# Altium PCB AutoMOO_PCB.PcbDoc
Units mil, origin at the board's own origin, x right, y up, seen from the top; angles counter-clockwise.
Board outline 2700 x 2100 mil, 2 copper layers (Top Layer, Bottom Layer); 20 components, 26 nets, 112 pads, 5 vias.
Unrouted connection lines stored in the file: 4.
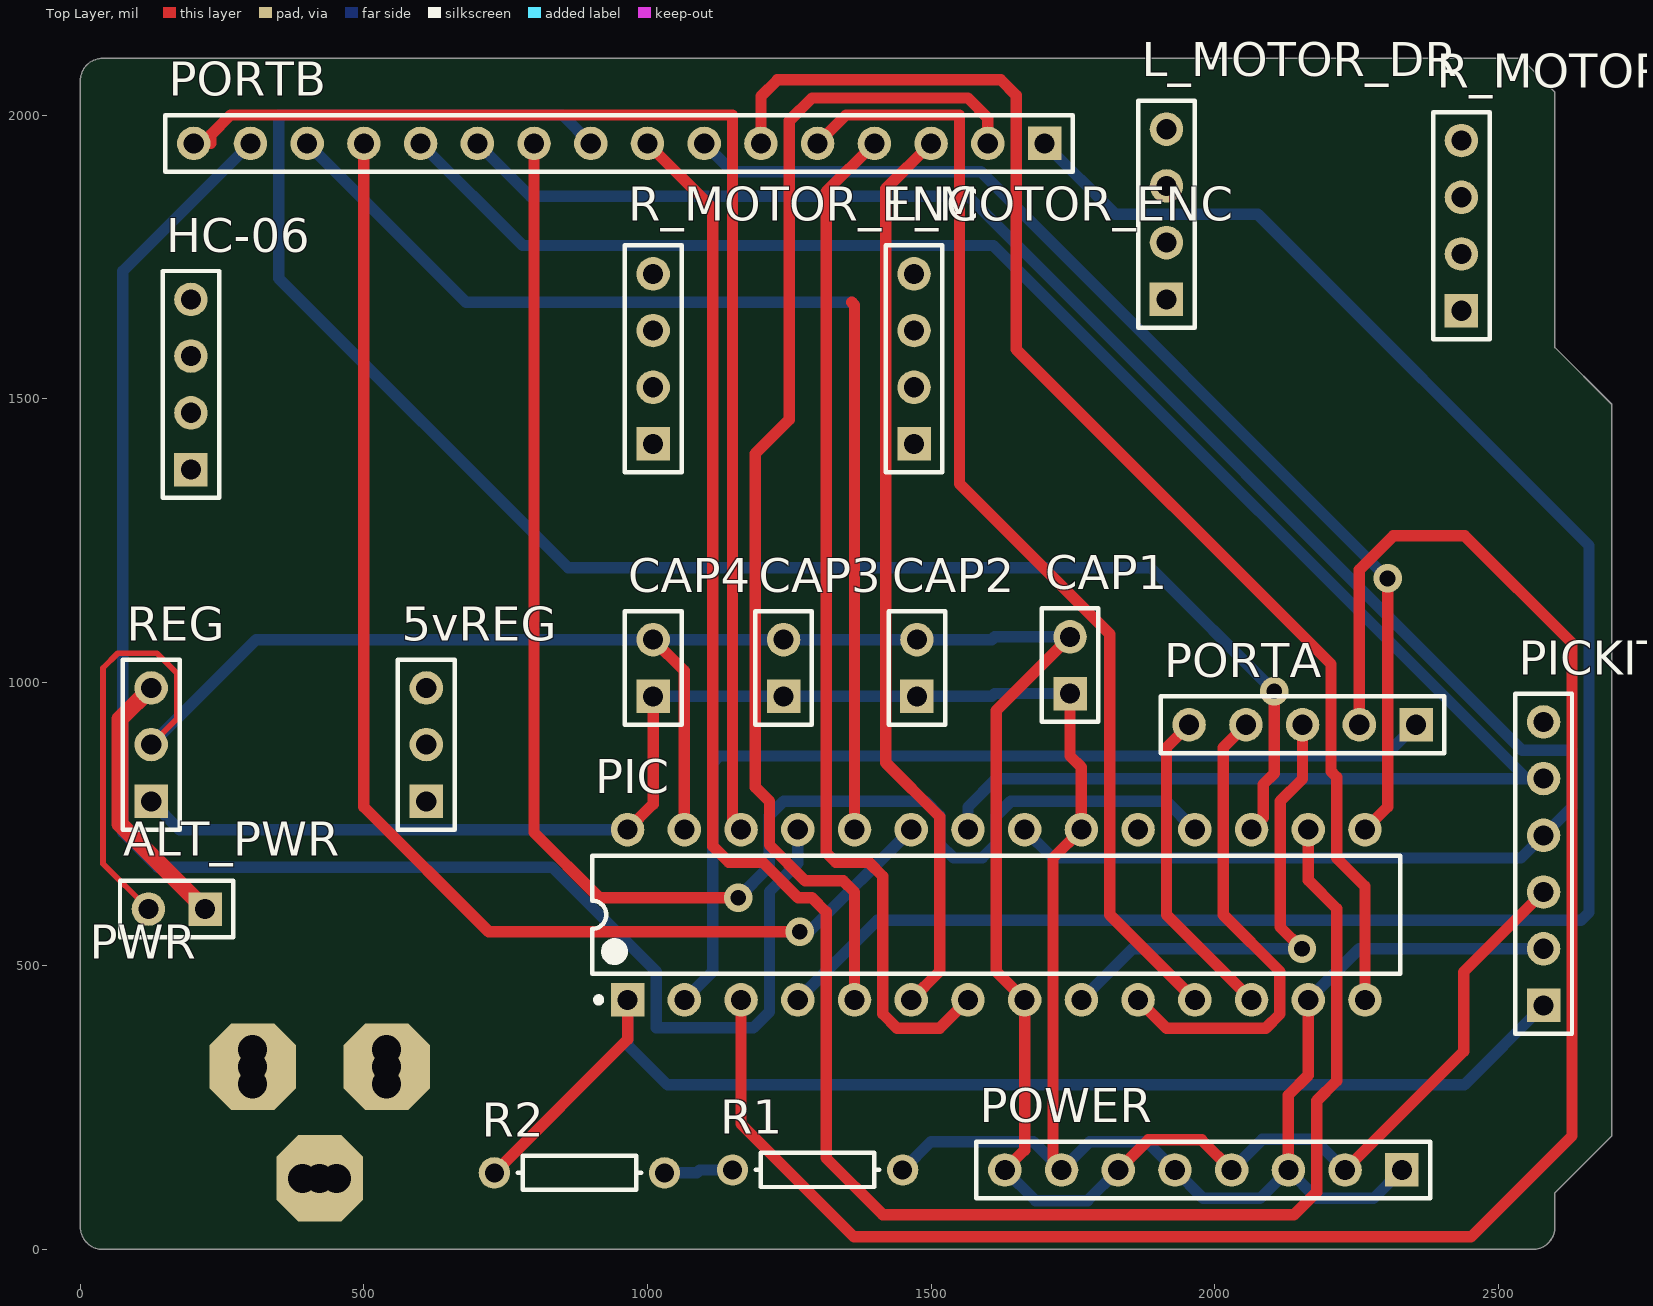
[diagram p0: Top Layer view]
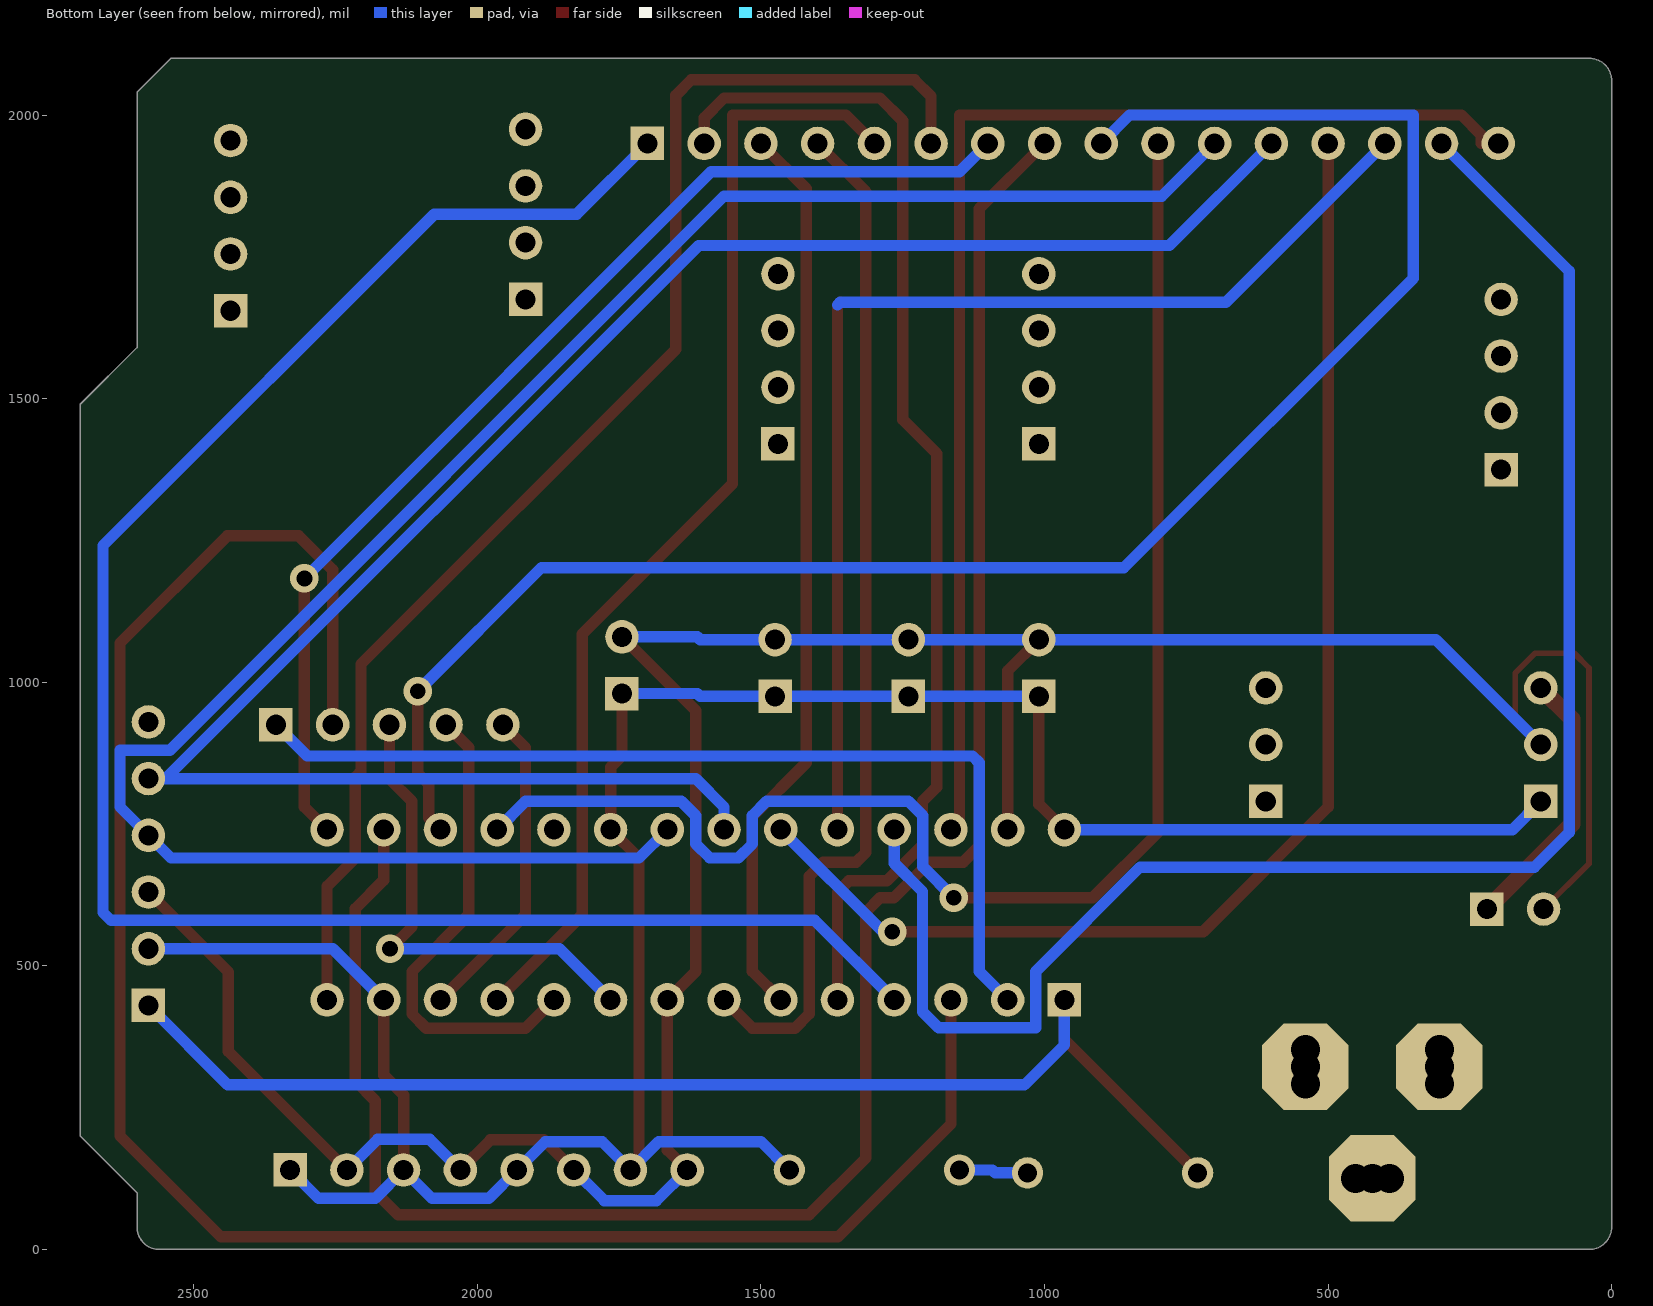
[diagram p1: Bottom Layer view, seen from below]

## Layer stack, top to bottom
Top Solder: solder mask 0.4, Solder Resist, Dk 3.5
Top Layer: signal copper 1.4
Dielectric 1: dielectric 12.6, FR-4, Dk 4.8
Bottom Layer: signal copper 1.4
Bottom Solder: solder mask 0.4, Solder Resist, Dk 3.5

## Board outline
0,39.37 0,2060.63 cw(c39.37,2060.63) 39.37,2100 2540,2100 2600,2040 2600,1590 2700,1490 2700,200 2600,100 2600,39.37 cw(c2560.63,39.37) 2560.63,0 39.37,0 cw(c39.37,39.37)

## Design rules (kind name [scope] priority, off if disabled: settings)
Clearance [All] p1: gap=10 ignorepadtopadclearanceinfootprint=FALSE except(0: Arc-Hole Track-Hole SMDPad-Hole THPad-Hole Via-Hole Fill-Hole Poly-Hole Region-Hole Text-Hole)
PolygonConnect [All] p1: connectstyle=Relief reliefconductorwidth=10 reliefentries=4 polygonreliefangle="90 Angle" airgapwidth=10
RoutingVias [All] p1: holewidth=28 width=50 viastyle="Through Hole" minholewidth=28 minwidth=50 maxholewidth=28 maxwidth=50
SolderMaskExpansion [All] p1: expansion=4
Width [InNet('VCC')] p1: maxlimit=30 minlimit=30 preferedwidth=30 minimp=50.000000 maximp=50.000000 favimp=50.000000
30 further rules are at their usual default settings.

## Components (designator, comment, footprint, x,y, rotation, side; value= is the part's Value field where it differs from the comment)
5vREG "Header 3" HDR1X3 610,790 r90 top
ALT_PWR "Header 2" HDR1X2 220,600 r180 top
CAP1 "Header 2" HDR1X2 1745,980 r90 top
CAP2 "Header 2" HDR1X2 1475,975 r90 top
CAP3 "Header 2" HDR1X2 1240,975 r90 top
CAP4 "Header 2" HDR1X2 1010,975 r90 top
HC-06 "Header 4" HDR1X4 195,1375 r90 top
L_MOTOR_DR "Header 4" HDR1X4 1915,1675 r90 top
L_MOTOR_ENC "Header 4" HDR1X4 1470,1420 r90 top
PIC "PIC24FJ128GA202" SPDIP300-SP28 1615,590 r90 top
PICKIT "Header 6" HDR1X6 2580,430 r90 top
PORTA "Header 5" HDR1X5 2355,925 r180 top
PORTB "Header 16" HDR1X16 1700,1950 r180 top
POWER "Header 8" HDR1X8 2330,140 r180 top
PWR "POWERSUPPLY_DC21MMX" POWERSUPPLY 290,325 r90 top
R1 "Res1" AXIAL-0.3 1300,140 r0 top value=10k
R2 "Res1" AXIAL-0.3 880,135 r180 top value=100
R_MOTOR_DR "Header 4" HDR1X4 2435,1655 r90 top
R_MOTOR_ENC "Header 4" HDR1X4 1010,1420 r90 top
REG "Header 3" HDR1X3 125,790 r90 top

## Footprints (in the part's own frame and the unit in brackets; to place one, negate y for a bottom-side part, rotate by r counter-clockwise, add the part's x,y. Pads: shape width x height; smd on the part's side, far side on the other; paste and mask are expansions set on the pad)
AXIAL-0.3 [mm] "Axial Device, Thru-Hole; 2 Leads; 0.3 in Pin Spacing"
  round 1.4 hole 0.85: 1(-3.81,0) 2(3.81,0)
  silkscreen extent -2.77,-0.76 2.77,0.76
HDR1X2 [mm] "Connector; Header; 2 Position"
  rect 1.5x1.5 hole 0.9: 1(0,0)
  round 1.5 hole 0.9: 2(2.54,0)
  silkscreen extent -1.27,-1.27 3.81,1.27
HDR1X3 [mm] "Connector; Header; 3 Position"
  rect 1.5x1.5 hole 0.9: 1(0,0)
  round 1.5 hole 0.9: 2(2.54,0) 3(5.08,0)
  silkscreen extent -1.27,-1.27 6.35,1.27
HDR1X4 [mm] "Connector; Header; 4 Position"
  rect 1.5x1.5 hole 0.9: 1(0,0)
  round 1.5 hole 0.9: 2(2.54,0) 3(5.08,0) 4(7.62,0)
  silkscreen extent -1.27,-1.27 8.89,1.27
HDR1X5 [mm] "Connector; Header; 5 Position"
  rect 1.5x1.5 hole 0.9: 1(0,0)
  round 1.5 hole 0.9: 2(2.54,0) 3(5.08,0) 4(7.62,0) 5(10.16,0)
  silkscreen extent -1.27,-1.27 11.43,1.27
HDR1X6 [mm] "Connector; Header; 6 Position"
  rect 1.5x1.5 hole 0.9: 1(0,0)
  round 1.5 hole 0.9: 2(2.54,0) 3(5.08,0) 4(7.62,0) 5(10.16,0) 6(12.7,0)
  silkscreen extent -1.27,-1.27 13.97,1.27
HDR1X8 [mm] "Connector; Header; 8 Position"
  rect 1.5x1.5 hole 0.9: 1(0,0)
  round 1.5 hole 0.9: 2(2.54,0) 3(5.08,0) 4(7.62,0) 5(10.16,0) 6(12.7,0) 7(15.24,0) 8(17.78,0)
  silkscreen extent -1.27,-1.27 19.05,1.27
HDR1X16 [mm] "Connector; Header; 16 Position"
  rect 1.5x1.5 hole 0.9: 1(0,0)
  round 1.5 hole 0.9: 2(2.54,0) 3(5.08,0) 4(7.62,0) 5(10.16,0) 6(12.7,0) 7(15.24,0) 8(17.78,0) 9(20.32,0) 10(22.86,0) 11(25.4,0) 12(27.94,0) 13(30.48,0) 14(33.02,0) 15(35.56,0) 16(38.1,0)
  silkscreen extent -1.27,-1.27 39.37,1.27
POWERSUPPLY [mil] "POWERSUPPLY_DC-21MM"
  oct 152.48x152.48 / inner oct 60x60 / far side oct 152.48x152.48 hole 51.18: 1(-200,-132) 2(-3,-250) 3(-3,-14)
  round 76.77 / inner round 60 / far side round 76.77 hole 51.18: 4(-200,-162) 5(-200,-102) 6(-33,-14) 7(27,-14) 8(-33,-250) 9(27,-250)
SPDIP300-SP28 [mm] "DIP, 28-Leads, Row Spacing 7.62mm, Pitch 2.54mm, Body 34.9x6.8mm"
  rect 1.5x1.5 hole 0.9: 1(-3.81,16.51)
  round 1.5 hole 0.9: 2(-3.81,13.97) 3(-3.81,11.43) 4(-3.81,8.89) 5(-3.81,6.35) 6(-3.81,3.81) 7(-3.81,1.27) 8(-3.81,-1.27) 9(-3.81,-3.81) 10(-3.81,-6.35) 11(-3.81,-8.89) 12(-3.81,-11.43) 13(-3.81,-13.97) 14(-3.81,-16.51) 15(3.81,-16.51) 16(3.81,-13.97) 17(3.81,-11.43) 18(3.81,-8.89) 19(3.81,-6.35) 20(3.81,-3.81) 21(3.81,-1.27) 22(3.81,1.27) 23(3.81,3.81) 24(3.81,6.35) 25(3.81,8.89) 26(3.81,11.43) 27(3.81,13.97) 28(3.81,16.51)
  silkscreen extent -3.93,-18.1 2.65,18.1, body extent -3.55,-18.1 3.55,18.1, height 5.33

## Part data
5vREG REG: "Header, 3-Pin", LatestRevisionDate=17-Jul-2002, LatestRevisionNote="Re-released for DXP Platform.", Publisher="Altium Limited"
ALT_PWR CAP1 CAP2 CAP3 CAP4: "Header, 2-Pin", LatestRevisionDate=17-Jul-2002, LatestRevisionNote="Re-released for DXP Platform.", Publisher="Altium Limited"
HC-06 L_MOTOR_DR L_MOTOR_ENC R_MOTOR_DR R_MOTOR_ENC: "Header, 4-Pin", LatestRevisionDate=17-Jul-2002, LatestRevisionNote="Re-released for DXP Platform.", Publisher="Altium Limited"
PICKIT: "Header, 6-Pin", LatestRevisionDate=17-Jul-2002, LatestRevisionNote="Re-released for DXP Platform.", Publisher="Altium Limited"
PORTA: "Header, 5-Pin", LatestRevisionDate=17-Jul-2002, LatestRevisionNote="Re-released for DXP Platform.", Publisher="Altium Limited"
PORTB: "Header, 16-Pin", LatestRevisionDate=17-Jul-2002, LatestRevisionNote="Re-released for DXP Platform.", Publisher="Altium Limited"
POWER: "Header, 8-Pin", LatestRevisionDate=17-Jul-2002, LatestRevisionNote="Re-released for DXP Platform.", Publisher="Altium Limited"
PWR: library part POWERSUPPLY, DeviceName=X, DeviceSetName=POWERSUPPLY_DC21MM, GateName_1=G$1, LibraryName=SmartPrj, SymbolName_1=POWERSUPPLY_DC21PWR
R1 R2: "Resistor", LatestRevisionDate=17-Jul-2002, LatestRevisionNote="Re-released for DXP Platform.", PackageDescription="Axial Device, Thru-Hole; 2 Leads; 0.3 in Pin Spacing", PackageReference=AXIAL-0.3, Published=8-Jun-2000, Publisher="Altium Limited"

## Via types
v1: diameter 50, hole 28, Top Layer to Bottom Layer, 5 vias

## Nets (pads, with @x,y where several pads share a name; then routed paths per layer and width w, separated by ;. In a path a pad name is that pad's centre, name@x,y a point inside that pad or via, vN(x,y) a via of type N, cw(c..) or ccw(c..) an arc to the next point about the centre after c; other vN are vias at no path point)
A0: PIC.2 PORTA.1 | length 1706.5
  Bottom Layer w20: PIC.2 1115,490 1115,858 1127,870 2300,870 PORTA.1
A1: PIC.3 PORTA.2 | length 3460.3
  Top Layer w20: PIC.3 1165,221 1364,22 2452,22 2630,200 2630,1069 2441,1258 2315,1258 2255,1198 PORTA.2
A2: PIC.9 PORTA.3 | length 853.6
  Top Layer w20: v1(2154,530) 2115.47,568.53 2115.47,790 2155,829.53 PORTA.3
  Bottom Layer w20: PIC.9 1855,530 v1(2154,530)
A3: PIC.10 PORTA.4 | length 849.1
  Top Layer w20: PIC.10 1915,390 2090,390 2115,415 2115,490 2015,590 2015,885 PORTA.4
A4: PIC.12 PORTA.5 | length 563.7
  Top Layer w20: PORTA.5 1915,885 1915,590 PIC.12
B0: PIC.4 PORTB.1 | length 3359.5
  Bottom Layer w20: PIC.4 1405,580 2646,580 2660,594 2660,1241 2076,1825 1825,1825 PORTB.1
B1: PIC.5 PORTB.2 | length 2112.7
  Top Layer w20: PIC.5 1365,630 1345,650 1278,650 1215,713 1215,790 1190,815 1190,1403 1250,1463 1250,1990 1290,2030 1565,2030 1600,1995 PORTB.2
B2: PIC.6 PORTB.3 | length 1603.2
  Top Layer w20: PIC.6 1515,490 1515,763 1420,858 1420,1870 PORTB.3
B3: PIC.7 PORTB.4 | length 1826.6
  Top Layer w20: PORTB.4 1315,1865 1315,699.85 1332.18,682.68 1390,682.68 1415,657.68 1415,415 1440,390 1515,390 PIC.7
B4: PIC.11 PORTB.5 | length 2002.6
  Top Layer w20: PORTB.5 1350,2000 1550,2000 1550,1350 1815,1085 1815,590 PIC.11
B5: PIC.14 PORTB.6 | length 2405.9
  Top Layer w20: PORTB.6 1200,2033 1229,2062 1623,2062 1650,2035 1650,1587 2205,1032 2205,843 2215,833 2215,690 2265,640 PIC.14
B6: PIC.15 PORTB.7 | length 1982.3
  Top Layer w20: PIC.15 2305,780 v1(2305,1183)
  Bottom Layer w20: PORTB.7 1150,1900 1588,1900 v1(2305,1183)
B7: PIC.16 PORTB.8 | length 3565.9
  Top Layer w20: PORTB.8 1115,1835 1115,711 1143.26,682.74 1202.83,682.74 1265.57,620 1290,620 1315,595 1315,161 1415,61 2140,61 2180,101 2180,262 2215,297 2215,601.13 2165,651.13 PIC.16
B8: PIC.17 PORTB.9 | length 3175.8
  Top Layer w20: PIC.17 2085.47,760.47 2085.47,819.53 2105,839.06 v1(2105,984)
  Bottom Layer w20: PORTB.9 850,2000 350,2000 350,1712 860,1202 1887,1202 v1(2105,984)
B9: PIC.18 PORTB.10 | length 2712.6
  Top Layer w20: PORTB.10 800,735 915,620 v1(1160,620)
  Bottom Layer w20: v1(1160,620) 1214.53,674.53 1214.53,764.53 1240,790 1490,790 1515,765 1515,715 1540,690 1590,690 1615,715 1615,764.53 1640.47,790 1915,790 PIC.18
B10: PIC.21 PICKIT.4 PORTB.11 | length 3496.2
  Bottom Layer w20: PORTB.11 793,1857 1565,1857 2542,880 2630,880 2630,780 PICKIT.4 2540,690 1715,690 PIC.21
B11: PIC.22 PICKIT.5 PORTB.12 | length 3489.2
  Bottom Layer w20: PORTB.12 780,1770 1609.53,1770 2549.53,830 ; PIC.22 1565,780 1615,830 2549.53,830 ; PICKIT.5 2549.53,830
B12: PIC.23 PORTB.13 | length 2300.7
  Top Layer w20: PORTB.13 500,780 720,560 v1(1268.5,560)
  Bottom Layer w20: v1(1268.5,560) 1285,560 PIC.23
B13: PIC.24 PORTB.14 | length 2015.1
  Top Layer w20: 1360,1670 1365,1665 PIC.24
  Bottom Layer w20: PORTB.14 680,1670 1360,1670 1365,1665
B14: PIC.25 PORTB.15 | length 3002.7
  Bottom Layer w20: PORTB.15 75,1725 75,735 136,674 831.47,674 1015.47,490 1015.47,390.47 1186.47,390.47 1215,419 1215,630.94 1265,680.94 PIC.25
B15: PIC.26 PORTB.16 | length 2245.7
  Top Layer w20: PORTB.16 230,1950 230,1965 265,2000 1150,2000 1150,755 PIC.26
GND: ALT_PWR.2 CAP1.2 CAP2.2 CAP3.2 CAP4.2 PIC.8 PIC.27 PICKIT.3 POWER.2 POWER.4 POWER.6 POWER.8 PWR.1 PWR.3 REG.2 | length 5211.9
  Top Layer w10: ALT_PWR.2 40,680 40,1025 66,1051 135,1051 170,1016 170,935 REG.2
  Top Layer w20: CAP4.2 1065,1020 PIC.27 ; POWER.8 1665,175 PIC.8 1615,490 1615,950 CAP1.2 ; POWER.6 1883,193 1977,193 POWER.4 ; POWER.2 2439,349 2439,489 PICKIT.3
  Bottom Layer w20: REG.2 310,1075 CAP4.2 CAP3.2 CAP2.2 1607,1075 1612,1080 CAP1.2 ; POWER.8 1684,86 1776,86 POWER.6 ; POWER.4 2084,194 2176,194 POWER.2
MCLR: PIC.1 PICKIT.1 R2.2 | length 2184
  Top Layer w20: R2.2 965,370 PIC.1
  Bottom Layer w20: PIC.1 965,360.47 1035.47,290 2440,290 PICKIT.1
NetR1_1: R1.1 R2.1 | length 122.1
  Bottom Layer w20: R2.1 1087,135 1092,140 R1.1
VCAP: CAP1.1 CAP2.1 CAP3.1 CAP4.1 PIC.13 PIC.20 PIC.28 PICKIT.2 POWER.1 POWER.3 POWER.5 POWER.7 R1.2 REG.1 | length 4547.9
  Top Layer w20: PIC.28 1010,785 CAP4.1 ; POWER.7 1715,140 1715,690 PIC.20 1765,850 1745,870 CAP1.1 ; POWER.3 2130,272 2165,307 PIC.13
  Bottom Layer w20: REG.1 175,740 PIC.28 ; CAP4.1 CAP3.1 CAP2.1 1607,975 1612,980 CAP1.1 ; R1.2 1500,190 1680,190 POWER.7 1780,190 1880,190 POWER.5 1980,90 2080,90 POWER.3 2180,90 2280,90 POWER.1 ; PIC.13 2255,530 PICKIT.2
VCC: ALT_PWR.1 PWR.2 REG.3 | length 474.9
  Top Layer w30: REG.3 70,935 70,750 ALT_PWR.1
pads on no net: 5vREG.1 5vREG.2 5vREG.3 HC-06.1 HC-06.2 HC-06.3 HC-06.4 L_MOTOR_DR.1 L_MOTOR_DR.2 L_MOTOR_DR.3 L_MOTOR_DR.4 L_MOTOR_ENC.1 L_MOTOR_ENC.2 L_MOTOR_ENC.3 L_MOTOR_ENC.4 PIC.19 PICKIT.6 PWR.4 PWR.5 PWR.6 PWR.7 PWR.8 PWR.9 R_MOTOR_DR.1 R_MOTOR_DR.2 R_MOTOR_DR.3 R_MOTOR_DR.4 R_MOTOR_ENC.1 R_MOTOR_ENC.2 R_MOTOR_ENC.3 R_MOTOR_ENC.4